# Altium PCB PCB1.PcbDoc
Units mil, origin at the board's own origin, x right, y up, seen from the top; angles counter-clockwise.
Board outline 2250 x 1360 mil, 2 copper layers (Top Layer, Bottom Layer); 54 components, 48 nets, 181 pads, 32 vias.
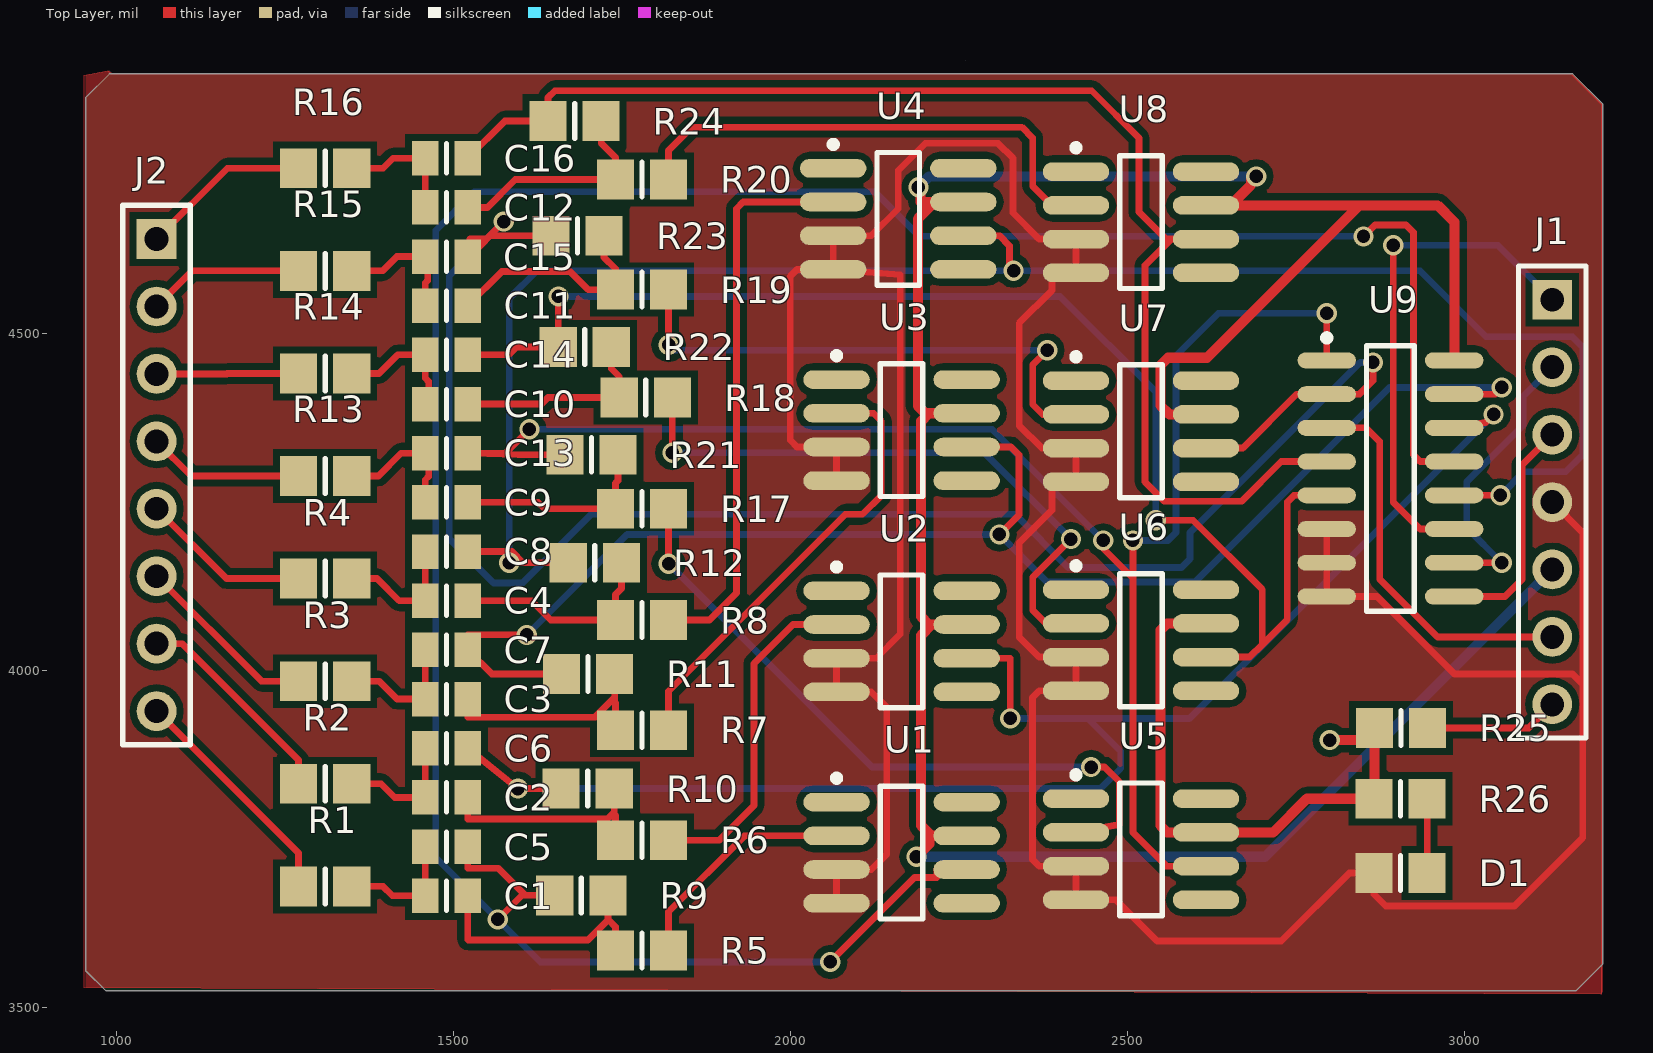
[diagram p0: Top Layer view]
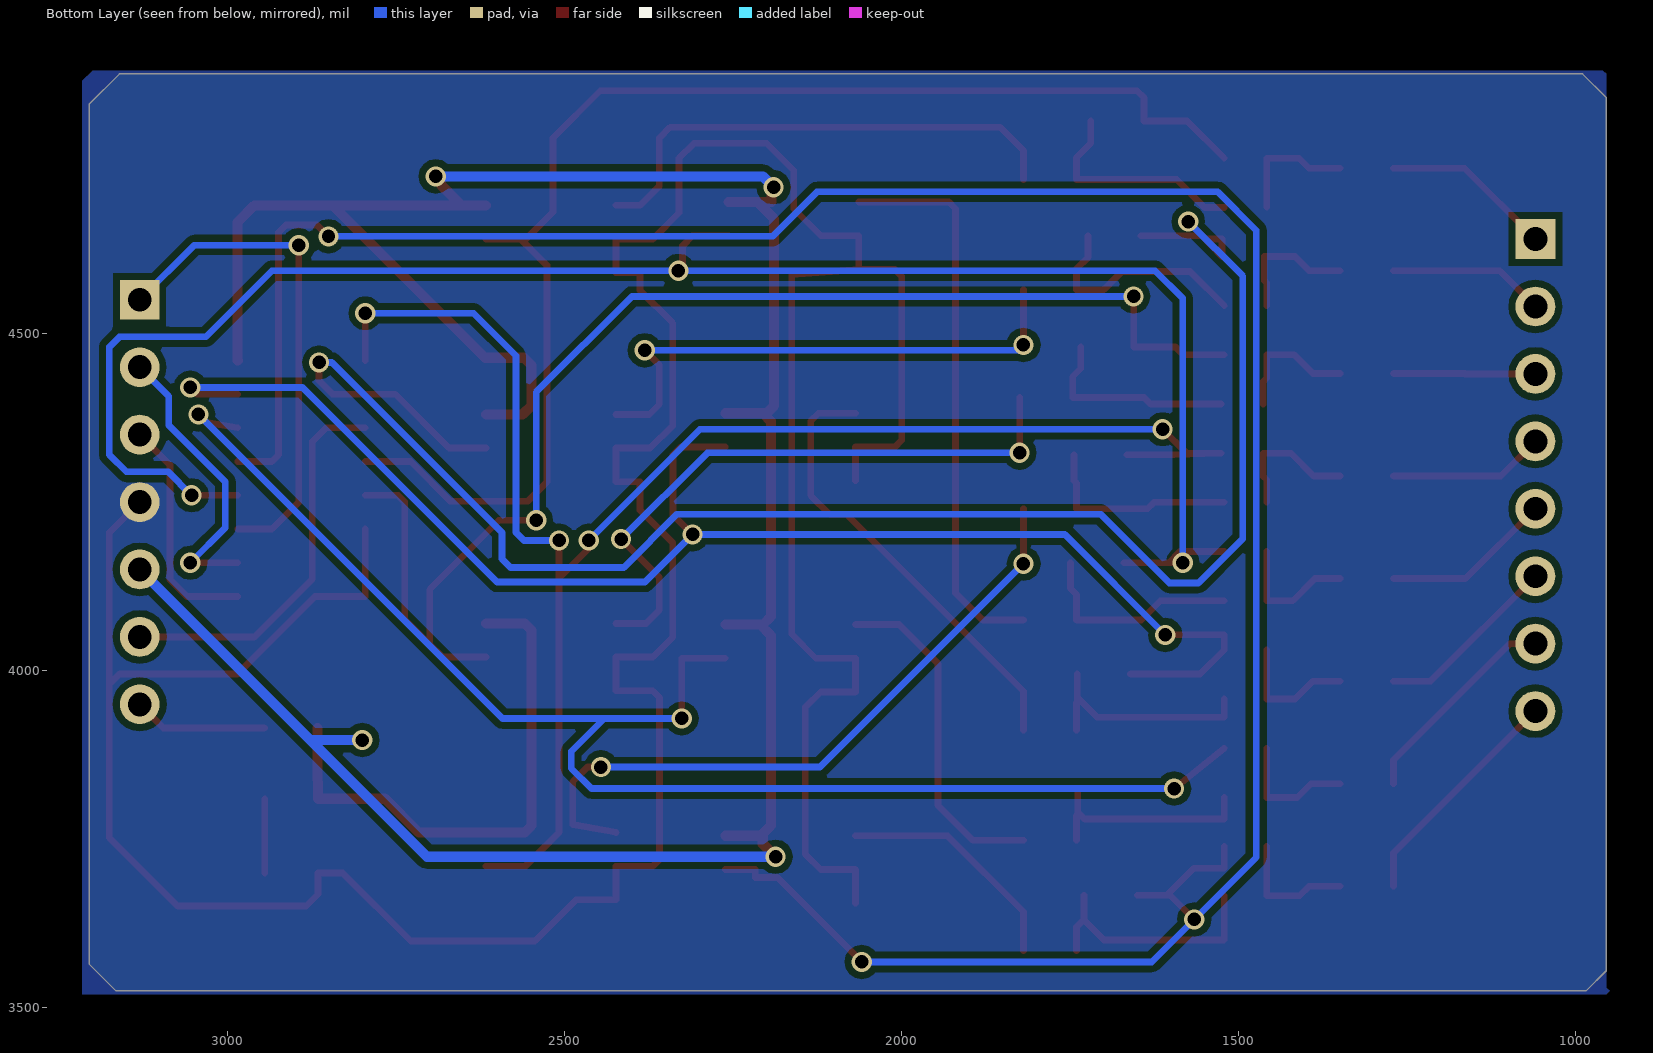
[diagram p1: Bottom Layer view, seen from below]

## Layer stack, top to bottom
Top Solder: solder mask 0.4, Solder Resist, Dk 3.5
Top Layer: signal copper 1.4
Dielectric 1: dielectric 12.6, FR-4, Dk 4.8
Bottom Layer: signal copper 1.4
Bottom Solder: solder mask 0.4, Solder Resist, Dk 3.5

## Board outline
985,3525 955,3555 955,4850 990,4885 3160,4885 3205,4840 3205,3565 3165,3525

## Design rules (kind name [scope] priority, off if disabled: settings)
Clearance [All] p1: gap=10 ignorepadtopadclearanceinfootprint=FALSE except(0: Arc-Hole Track-Hole SMDPad-Hole THPad-Hole Via-Hole Fill-Hole Poly-Hole Region-Hole Text-Hole)
PolygonConnect [All] p1: connectstyle=Direct reliefconductorwidth=10 reliefentries=4 polygonreliefangle="90 Angle" airgapwidth=10
RoutingVias [All] p1: holewidth=20 width=30 viastyle="Through Hole" minholewidth=28 minwidth=50 maxholewidth=28 maxwidth=50
SolderMaskExpansion [All] p1: expansion=4
Width Width_1 [InNet('+5')] p1: maxlimit=20 minlimit=10 preferedwidth=15
Width [All] p2: maxlimit=10 minlimit=10 preferedwidth=10
30 further rules are at their usual default settings.

## Components (designator, comment, footprint, x,y, rotation, side; value= is the part's Value field where it differs from the comment)
C1 "220nF" 6-0805_L 1490,3666.06 r0 top
C2 "220nF" 6-0805_L 1490,3811.92 r0 top
C3 "220nF" 6-0805_L 1490,3957.78 r0 top
C4 "220nF" 6-0805_L 1490,4103.64 r0 top
C5 "1nF" 6-0805_L 1490,3738.99 r0 top
C6 "1nF" 6-0805_L 1490,3884.85 r0 top
C7 "1nF" 6-0805_L 1490,4030.71 r0 top
C8 "1nF" 6-0805_L 1490,4176.57 r0 top
C9 "220nF" 6-0805_L 1490,4249.5 r0 top
C10 "220nF" 6-0805_L 1490,4395.35 r0 top
C11 "220nF" 6-0805_L 1490,4541.21 r0 top
C12 "220nF" 6-0805_L 1490,4687.07 r0 top
C13 "1nF" 6-0805_L 1490,4322.43 r0 top
C14 "1nF" 6-0805_L 1490,4468.28 r0 top
C15 "1nF" 6-0805_L 1490,4614.14 r0 top
C16 "1nF" 6-0805_L 1490,4760 r0 top
D1 "LED_Red" 6-0805_M 2905,3700 r180 top
J1 "CON7" HDR1X7 3130,4550 r270 top
J2 "CON8" HDR1X8 1060,4640 r270 top
R1 "33" 6-0805_M 1310,3680 r0 top
R2 "33" 6-0805_M 1310,3832.14 r0 top
R3 "33" 6-0805_M 1310,3984.29 r0 top
R4 "33" 6-0805_M 1310,4136.43 r0 top
R5 "1K" 6-0805_M 1780,3585 r0 top
R6 "1K" 6-0805_M 1780,3748.33 r0 top
R7 "1K" 6-0805_M 1780,3911.67 r0 top
R8 "1K" 6-0805_M 1780,4075 r0 top
R9 "100M" 6-0805_M 1690,3666.67 r180 top
R10 "100M" 6-0805_M 1699.37,3825 r180 top
R11 "100M" 6-0805_M 1700,3995 r180 top
R12 "100M" 6-0805_M 1710,4160 r180 top
R13 "33" 6-0805_M 1310,4288.57 r0 top
R14 "33" 6-0805_M 1310,4440.71 r0 top
R15 "33" 6-0805_M 1310,4592.86 r0 top
R16 "33" 6-0805_M 1310,4745 r0 top
R17 "1K" 6-0805_M 1780,4240 r0 top
R18 "1K" 6-0805_M 1785.63,4405 r0 top
R19 "1K" 6-0805_M 1780,4565 r0 top
R20 "1K" 6-0805_M 1780,4728.33 r0 top
R21 "100M" 6-0805_M 1705,4320 r180 top
R22 "100M" 6-0805_M 1695,4480 r180 top
R23 "100M" 6-0805_M 1684.37,4645 r180 top
R24 "100M" 6-0805_M 1680,4815 r180 top
R25 "1k" 6-0805_M 2905.63,3915 r180 top
R26 "220" 6-0805_M 2905,3810 r180 top
U1 "CA3140" SO8_M 2165,3730 r0 top
U2 "CA3140" SO8_M 2165,4043.33 r0 top
U3 "CA3140" SO8_M 2165,4356.67 r0 top
U4 "CA3140" SO8_M 2160,4670 r0 top
U5 "CA3140" SO8_M 2520,3735 r0 top
U6 "CA3140" SO8_M 2520,4045 r0 top
U7 "CA3140" SO8_M 2520,4355 r0 top
U8 "CA3140" SO8_M 2520,4665 r0 top
U9 "CD4051BCM" M16A_N 2890,4285 r0 top

## Footprints (in the part's own frame and the unit in brackets; to place one, negate y for a bottom-side part, rotate by r counter-clockwise, add the part's x,y. Pads: shape width x height; smd on the part's side, far side on the other; paste and mask are expansions set on the pad)
6-0805_L [mm] "Chip Resistor, Body 2.0x1.2mm, IPC High Density"
  rect 1x1.3 smd: 1(-0.8,0) 2(0.8,0)
  silkscreen extent 0,-0.55 0,0.55, body extent -1.07,-0.7 1.07,0.7, height 0.7
6-0805_M [mm] "Chip Resistor, Body 2.0x1.2mm, IPC Low Density"
  rect 1.4x1.5 smd: 1(-1,0) 2(1,0)
  silkscreen extent 0,-0.65 0,0.65, body extent -1.07,-0.7 1.07,0.7, height 0.7
HDR1X7 [mm] "Connector; Header; 7 Position"
  rect 1.5x1.5 hole 0.9: 1(0,0)
  round 1.5 hole 0.9: 2(2.54,0) 3(5.08,0) 4(7.62,0) 5(10.16,0) 6(12.7,0) 7(15.24,0)
  silkscreen extent -1.27,-1.27 16.51,1.27
HDR1X8 [mm] "Connector; Header; 8 Position"
  rect 1.5x1.5 hole 0.9: 1(0,0)
  round 1.5 hole 0.9: 2(2.54,0) 3(5.08,0) 4(7.62,0) 5(10.16,0) 6(12.7,0) 7(15.24,0) 8(17.78,0)
  silkscreen extent -1.27,-1.27 19.05,1.27
M16A_N [mm] "SOIC, 16-Leads, Body 9.9x3.9mm, Pitch 1.27mm, IPC Medium Density"
  oval 2.2x0.6 smd: 1(-2.4,4.445) 2(-2.4,3.175) 3(-2.4,1.905) 4(-2.4,0.635) 5(-2.4,-0.635) 6(-2.4,-1.905) 7(-2.4,-3.175) 8(-2.4,-4.445) 9(2.4,-4.445) 10(2.4,-3.175) 11(2.4,-1.905) 12(2.4,-0.635) 13(2.4,0.635) 14(2.4,1.905) 15(2.4,3.175) 16(2.4,4.445)
  silkscreen extent -2.52,-5 0.9,5.42, body extent -2,-5 2,5, height 1.75
SO8_M [mm] "SOIC, 8-Leads, Body 4.9x3.9mm, Pitch 1.27mm, IPC Low Density"
  oval 2.5x0.7 smd: 1(-2.45,1.905) 2(-2.45,0.635) 3(-2.45,-0.635) 4(-2.45,-1.905) 5(2.45,-1.905) 6(2.45,-0.635) 7(2.45,0.635) 8(2.45,1.905)
  silkscreen extent -2.57,-2.5 0.8,2.93, body extent -2,-2.5 2,2.5, height 1.75

## Part data
C1 C2 C3 C4 C5 C6 C7 C8 C9 C10 C11 C12 C13 C14 C15 C16: library part CAP, "电容"
D1: library part LED, "LED"
J1: "Connector"
J2: "连接器"
R1 R2 R3 R4 R5 R6 R7 R8 R9 R10 R11 R12 R13 R14 R15 R16 R17 R18 R19 R20 R21 R22 R23 R24 R25 R26: library part RES, "电阻"
U9: "8-Channel Analog Multiplexer/Demultiplexer", Code_IPC=SOIC127P600-16, ComponentLink1Description="Manufacturer Link", ComponentLink1URL=http://www.fairchildsemi.com/, ComponentLink2Description=Datasheet, ComponentLink2URL=http://www.fairchildsemi.com/ds/CD%2FCD4052BC.pdf, DatasheetVersion=Jan-1999, LatestRevisionDate=13-Apr-2006, LatestRevisionNote="IPC-7351 Footprint Added.", PackageDescription="16-Pin Small Outline Integrated Circuit 1.27 mm Pitch", PackageReference=M16A, PackageVersion=2000, Published=17-Jul-2002, Publisher="Altium Limited"

## Via types
v1: diameter 30, hole 20, Top Layer to Bottom Layer, tented both sides, 32 vias

## Nets (pads, with @x,y where several pads share a name; then routed paths per layer and width w, separated by ;. In a path a pad name is that pad's centre, name@x,y a point inside that pad or via, vN(x,y) a via of type N, cw(c..) or ccw(c..) an arc to the next point about the centre after c; other vN are vias at no path point)
+5: J1.5 R25.2 R26.2 U1.7 U2.7 U3.7 U4.7 U5.7 U6.7 U7.7 U8.7 U9.16 | length 5028
  Top Layer w15: v1(2187,3724) 2206,3743 2206,3755 2209,3755 ; v1(2190,4717) 2193,4714 2193,4695 U4.7@2214,4695 ; U4.7 U4.7@2214,4695 ; U1.7 2209,3755 ; U2.7 2210,4068.33 ; U3.7 2205.67,4381.67 ; U6.7 2559,4070 2549,4060 2549,3770 2559,3760 U5.7 2716,3760 2766,3810 R26.2 2866.26,3862.63 R25.2@2866.26,3897 ; U7.7 2562,4380 2549,4393 2549,4453 2560,4464 2618,4464 2844,4690 ; U8.7 U8.7@2653,4690 ; v1(2691,4733) 2683,4733 2683,4720 U8.7@2653,4690 ; v1(2800,3897) R25.2@2866.26,3897 ; R25.2 R25.2@2866.26,3897 ; U9.16 2985,4460 2985,4665 2960,4690 2844,4690 ; 2205.67,4381.67 2200,4381.67 2189,4392.67 2189,4670 U4.7@2214,4695 ; 2205.67,4381.67 2194,4370 2194,4080 2205.67,4068.33 2210,4068.33 ; 2209,3755 2194,3770 2194,4052.33 2210,4068.33 ; U8.7@2653,4690 2844,4690
  Bottom Layer w15: v1(2187,3724) 2704,3724 2877,3897 ; v1(2190,4717) 2206,4733 v1(2691,4733) ; v1(2800,3897) 2877,3897 ; J1.5 2877,3897
Address_A: J1.1 U9.11 | length 757.6
  Top Layer w10: v1(2894,4631) 2894,4250 2934,4210 U9.11
  Bottom Layer w10: v1(2894,4631) 3049,4631 J1.1
Address_B: J1.2 U9.10 | length 434.7
  Top Layer w10: U9.10 v1(3055,4160)
  Bottom Layer w10: v1(3055,4160) 3003,4212 3003,4280 3087,4364 3087,4407 J1.2
Address_C: J1.3 U9.9 | length 344.5
  Top Layer w10: U9.9 3060,4110 3085,4135 3085,4305 J1.3
Common_Out: J1.6 U9.3 | length 582.4
  Top Layer w10: U9.3 2854,4360 2874,4340 2874,4136 2960,4050 J1.6
EX0: J1.7 R25.1 | length 199.5
  Top Layer w10: R25.1 3095,3915 J1.7
GND: D1.2 J1.4 U1.3 U1.4 U2.3 U2.4 U3.3 U3.4 U4.3 U4.4 U5.3 U5.4 U6.3 U6.4 U7.3 U7.4 U8.3 U8.4 U9.6 U9.7 U9.8 | length 5556.7
  Top Layer w10: U1.4 U1.3 2120,3705 2143,3728 2143,3945.33 2120,3968.33 U2.4 U2.3 2127.33,4018.33 2163,4054 2163,4587 U4.4 ; U3.4 U3.3 2010,4331.67 2000,4341.67 2000,4585 2010,4595 U4.4 ; U9.6 U9.7 U9.8 2870,4110 2985,3995 3160,3995 3175,3980 ; J1.4 3175,4205 3175,3980 ; U4.4 U4.3 2120,4645 2160,4685 2160,4742 2200,4782 2308,4782 2330,4760 2330,4679 2369,4640 U8.3 U8.4 2388,4590 2388,4564 2339.33,4515.33 2339.33,4363.67 2373,4330 U7.3 U7.4 2388,4280 2388,4238 2339.33,4189.33 2339.33,4049.67 2369,4020 U6.3 U6.4 2369,3970 2359,3960 2359,3720 2369,3710 U5.3 U5.4 2483,3660 2544,3599 2728,3599 2829,3700 D1.2 2865.63,3668.37 2883,3651 3074,3651 3175,3752 3175,3980
IN_1: J2.8 R1.1 | length 347.2
  Top Layer w10: J2.8 1270.63,3729.37 R1.1
IN_2: J2.7 R2.1 | length 317.4
  Top Layer w10: J2.7 1098,4040 1270.63,3867.37 R2.1
IN_3: J2.6 R3.1 | length 275.1
  Top Layer w10: J2.6 1215.71,3984.29 R3.1
IN_4: J2.5 R4.1 | length 253.5
  Top Layer w10: J2.5 1163.57,4136.43 R4.1
IN_5: J2.4 R13.1 | length 231.9
  Top Layer w10: J2.4 1111.43,4288.57 R13.1
IN_6: J2.3 R14.1 | length 210.9
  Top Layer w10: J2.3 1164,4440 1164.71,4440.71 R14.1
IN_7: J2.2 R15.1 | length 232.5
  Top Layer w10: J2.2 1112.86,4592.86 R15.1
IN_8: J2.1 R16.1 | length 254.1
  Top Layer w10: J2.1 1165,4745 R16.1
NetC1_1: C1.1 C5.1 R1.2 | length 187.8
  Top Layer w10: R1.2 1396,3680 1409.94,3666.06 C1.1 C5.1
NetC1_2: C1.2 R5.1 R9.1 | length 373
  Top Layer w10: C1.2 1521.5,3601.22 1522.27,3600.45 1700,3600.45 1729.37,3629.82 1729.37,3631.26 ; R9.1 1729.37,3631.26 ; R5.1 1740.63,3620 1729.37,3631.26
NetC2_1: C2.1 C6.1 R2.2 | length 190.4
  Top Layer w10: R2.2 1393,3832.14 1413.22,3811.92 C2.1 C6.1
NetC2_2: C2.2 R6.1 R10.1 | length 330.8
  Top Layer w10: C2.2 1521.5,3780 1728.74,3780 1738.74,3790 ; R10.1 1738.74,3790 ; R6.1 1740.63,3785 1738.74,3786.89 1738.74,3790
NetC3_1: C3.1 C7.1 R3.2 | length 193
  Top Layer w10: R3.2 1390,3984.29 1416.51,3957.78 C3.1 C7.1
NetC3_2: C3.2 R7.1 R11.1 | length 340.5
  Top Layer w10: C3.2 1521.5,3931 1710.37,3931 1739.37,3960 ; R11.1 1739.37,3960 ; R7.1 1740.63,3952 1739.37,3953.26 1739.37,3960
NetC4_1: C4.1 C8.1 R4.2 | length 195.6
  Top Layer w10: R4.2 1387,4136.43 1419.79,4103.64 C4.1 C8.1
NetC4_2: C4.2 R8.1 R12.1 | length 319.6
  Top Layer w10: C4.2 1616,4103.64 1644.64,4075 R8.1 1740.63,4113 1749.37,4121.74 R12.1
NetC9_1: C9.1 C13.1 R13.2 | length 203.2
  Top Layer w10: R13.2 1389,4288.57 1422.85,4322.43 1463.5,4322.43 1463.5,4288 1458.5,4283 C9.1
NetC9_2: C9.2 R17.1 R21.1 | length 304.6
  Top Layer w10: C9.2 1626,4249.5 1635.5,4240 R17.1 1740.63,4278 1744.37,4281.74 R21.1
NetC10_1: C10.1 C14.1 R14.2 | length 195.6
  Top Layer w10: R14.2 1390,4440.71 1417.57,4468.28 C14.1 1458.5,4434 1463.5,4429 C10.1@1463.5,4395.35
NetC10_2: C10.2 R18.1 R22.1 | length 303.7
  Top Layer w10: C10.2@1526.5,4395.35 1631,4395.35 1640.65,4405 R18.1 1746.26,4436 1734.37,4447.89 R22.1
NetC11_1: C11.1 C15.1 R15.2 | length 195.8
  Top Layer w10: R15.2 1395,4592.86 1416.29,4614.14 1462.01,4614.14 1462.01,4578.5 1458.5,4575 C11.1
NetC11_2: C11.2 R19.1 R23.1 | length 338.2
  Top Layer w10: C11.2 1572.12,4591.84 1673.28,4591.84 1700.12,4565 R19.1 1740.63,4596 1723.74,4612.89 R23.1
NetC12_1: C12.1 C16.1 R16.2 | length 188.3
  Top Layer w10: R16.2 1396,4745 1411,4760 C16.1 C12.1
NetC12_2: C12.2 R20.1 R24.1 | length 331.8
  Top Layer w10: C12.2 1521.5,4687 1550.67,4687 1592,4728.33 R20.1 1740.63,4761 1719.37,4782.26 R24.1
NetD1_1: D1.1 R26.1 | length 110
  Top Layer w10: D1.1 R26.1
NetR5_2: R5.2 U1.2 | length 353.2
  Top Layer w10: R5.2 1819.37,3642.37 1932,3755 U1.2
NetR6_2: R6.2 U2.2 | length 504.9
  Top Layer w10: R6.2 1894.33,3748.33 1946,3800 1946,4010.33 2004,4068.33 U2.2
NetR7_2: R7.2 U3.2 | length 674.7
  Top Layer w10: R7.2 1819.37,3969.37 2081.87,4231.87 2106.73,4231.87 2134.87,4260 2134.87,4370 2123.2,4381.67 U3.2
NetR8_2: R8.2 U4.2 | length 834.9
  Top Layer w10: R8.2 1880,4075 1920,4115 1920,4685 1930,4695 U4.2
NetR17_2: R17.2 U5.2 | length 1012.5
  Top Layer w10: v1(1819.37,4158.63) R17.2 ; U5.2 2487.76,3771.76 2487.76,3835.24 2466,3857 v1(2446,3857)
  Bottom Layer w10: v1(1819.37,4158.63) 2121,3857 v1(2446,3857)
NetR18_2: R18.2 U6.2 | length 927.2
  Top Layer w10: v1(1825,4323) R18.2 ; v1(2416,4195) 2359.33,4138.33 2359.33,4089.67 2379,4070 U6.2
  Bottom Layer w10: v1(1825,4323) 2288,4323 v1(2416,4195)
NetR19_2: R19.2 U7.2 | length 806.3
  Top Layer w10: v1(1819.37,4483) R19.2 ; v1(2381,4475) 2359.33,4453.33 2359.33,4395 2374.33,4380 U7.2
  Bottom Layer w10: v1(1819.37,4483) 1827.37,4475 v1(2381,4475)
NetR20_2: R20.2 U8.2 | length 751.4
  Top Layer w10: R20.2 1819.37,4771.37 1854,4806 2343.33,4806 2359.33,4790 2359.33,4718.67 2388,4690 U8.2
OUT_1: C5.2 R9.2 U1.6 U9.13 | length 3986.1
  Top Layer w10: C5.2 1521.5,3707 1566.67,3707 1607,3666.67 ; v1(1566,3631) 1601.67,3666.67 1607,3666.67 ; R9.2 1607,3666.67 ; v1(2059,3568) 2184.22,3693.22 2217.24,3693.22 2217.24,3705 U1.6 ; v1(2850,4644) 2867,4661 2913,4661 2924,4650 2924,4320 2934,4310 U9.13
  Bottom Layer w10: v1(2059,3568) 1629,3568 v1(1566,3631) 1474,3723 1474,4653 1531,4710 2125.46,4710 2191.46,4644 v1(2850,4644)
OUT_2: C6.2 R10.2 U2.6 U9.14 | length 2282.2
  Top Layer w10: C6.2 v1(1596,3825) R10.2 ; U2.6 2326,4018.33 v1(2326,3929) ; U9.14 3030.94,4367.94 v1(3043,4380)
  Bottom Layer w10: v1(1596,3825) 2460,3825 2490,3855 2490,3880 2441,3929 ; v1(2326,3929) 2441,3929 ; v1(3043,4380) 2592,3929 2441,3929
OUT_3: C7.2 R11.2 U3.6 U9.15 | length 2207.2
  Top Layer w10: v1(1609,4053) 1521.5,4053 C7.2 1557.21,3995 R11.2 ; U3.6 2327.33,4331.67 2339,4320 2339,4231 v1(2310,4202) ; U9.15 3045,4410 v1(3055,4420)
  Bottom Layer w10: v1(1609,4053) 1758,4202 v1(2310,4202) 2380.57,4131.43 2600,4131.43 2888.57,4420 v1(3055,4420)
OUT_4: C8.2 R12.2 U4.6 U9.12 | length 2714
  Top Layer w10: C8.2 1587,4176.57 1603.57,4160 ; v1(1583,4160) 1603.57,4160 ; R12.2 1603.57,4160 ; U4.6 2310,4645 2325,4630 2325,4599 v1(2331,4593) ; U9.12 v1(3053,4260)
  Bottom Layer w10: v1(1583,4160) 1583,4552 1624,4593 v1(2331,4593) 2934,4593 3032,4495 3160,4495 3175,4480 3175,4320 3150,4295 3088,4295 v1(3053,4260)
OUT_5: C13.2 R21.2 U5.6 U9.1 | length 2446.7
  Top Layer w10: v1(1613,4358) 1577.43,4322.43 1526.5,4322.43 1596.43,4320 R21.2 ; v1(2464,4193) 2464,4181 2508,4137 ; v1(2508,4193) 2508,4137 ; U5.6 2558,3710 2508,3760 2508,4137 ; U9.1 v1(2795.51,4530)
  Bottom Layer w10: v1(1613,4358) 2299,4358 v1(2464,4193) ; v1(2508,4193) 2560,4193 2572,4205 2572,4467 2635,4530 v1(2795.51,4530)
OUT_6: C14.2 R22.2 U6.6 U9.5 | length 2011
  Top Layer w10: C14.2 1582,4468.28 1593.72,4480 R22.2 1655.63,4554.63 v1(1656,4555) ; v1(2542,4223) 2597,4223 2700,4120 2700,4039 ; U6.6 2681,4020 2700,4039 ; U9.5 2747,4260 2737,4250 2737,4076 2700,4039
  Bottom Layer w10: v1(1656,4555) 2400,4555 2542,4413 v1(2542,4223)
OUT_7: C15.2 R23.2 U7.6 U9.2 | length 2661.3
  Top Layer w10: v1(1575,4666) 1554.93,4645.93 ; R23.2 1555.86,4645 1554.93,4645.93 ; U7.6 2671,4330 2751,4410 U9.2 2844,4410 2864,4430 v1(2864,4457) ; 1554.93,4645.93 1549,4640 1525,4640 1525,4614.14 1554.93,4645.93
  Bottom Layer w10: v1(1575,4666) 1494,4585 1494,4196 1560,4130 1603,4130 1705,4232 2333,4232 2412,4153 2580,4153 2592.73,4165.73 2592.73,4204.73 2845,4457 v1(2864,4457)
OUT_8: C16.2 R24.2 U8.6 U9.4 | length 1994.6
  Top Layer w10: C16.2 1576.5,4815 R24.2 1640.63,4850 1650.63,4860 2447,4860 2517,4790 2517,4680 2557,4640 2565,4640 ; U8.6 2565,4640 ; U9.4 2728,4310 2669,4251 2555,4251 2526,4280 2526,4601 2565,4640
pads on no net: U1.1 U1.5 U1.8 U2.1 U2.5 U2.8 U3.1 U3.5 U3.8 U4.1 U4.5 U4.8 U5.1 U5.5 U5.8 U6.1 U6.5 U6.8 U7.1 U7.5 U7.8 U8.1 U8.5 U8.8

## Polygon pours and split planes (outlines as drawn)
no net on Top Layer "Top Layer-No Net" (solid, remove dead copper, pour order 10): 987.5,4890 992.5,4885 3157.5,4885 3202.5,4840 3202.5,3520 952.5,3529.45 952.5,4883
GND on Top Layer "Top Layer-GND" (solid, remove dead copper, pour order 8): 990,4890 995,4885 3160,4885 3205,4840 3205,3520 955,3529.45 955,4883
GND on Bottom Layer "Bottom Layer-GND" (solid, pour order 12): 960,4890 3200,4890 3215,4875 3215,3520 955,3520 950,3525 955,3530 955,4885

## Keep-outs
Top Layer:
  region: 2260,4905

## Other copper
Top Layer:
  pour cut-out: 1765,4130 1774.53,4120.47 1786.93,4120.47 1786.93,4108.07 1790,4105 1760,4105
  pour cut-out: 2925,4145 2945,4125 2945,4070 2955,4060 2960.29,4065.29 3093.55,4065.29 3093.55,4121.92 3094.61,4122.98
  pour cut-out: 2925,4465 3033.02,4465 3036.53,4468.51 3061.49,4443.55 3064.75,4443.55 3064.75,4377.32 3031.71,4344.28 3031.71,4294.28 3070,4255.98 3070,4120 3050,4100 2910,4100 2874,4136
  pour cut-out: 2835,4350 2864,4350 2864,4239 2860,4235 2857.24,4237.76 2827.01,4237.76
  pour cut-out: 2645,4360 2575,4290 2575,4165 2675,4065 2740,4130 2740,4240 2760,4260 2840,4260 2840,4360 2835,4365 2905,4365 2905,4460 2900,4465

## Silkscreen, mask and mechanical layers (free items; w line width, h text height)
Mechanical 1:
  region: 1005,5005
  region: 1005,5030
  lines w10: 955,3555 985,3525 3165,3525 3205,3565 3205,4840 3160,4885 990,4885 955,4850 955,3555